# Altium PCB PCB2.PcbDoc
Units mm, origin at the board's own origin, x right, y up, seen from the top; angles counter-clockwise.
Board outline 74.93 x 58.67 mm, 2 copper layers (Top Layer, Bottom Layer); 44 components, 35 nets, 133 pads, 0 vias.
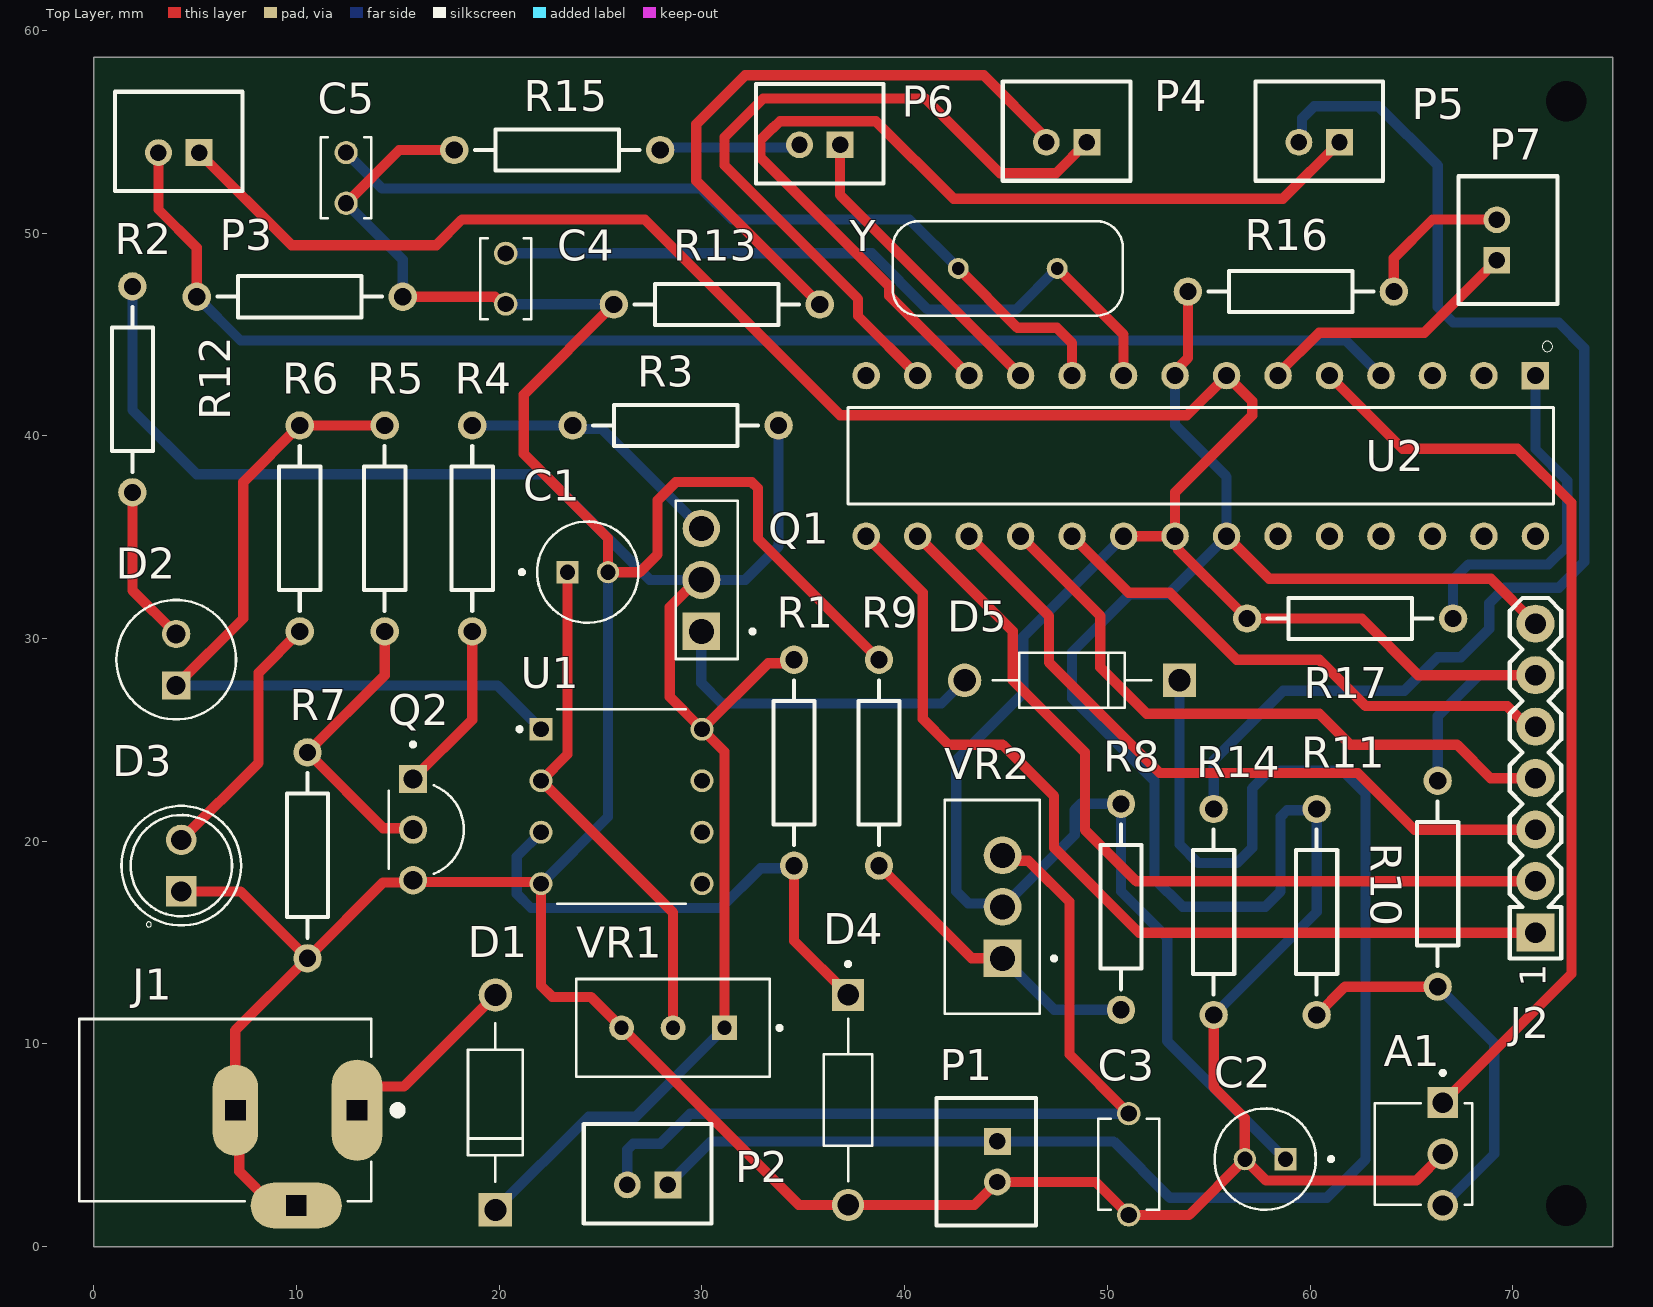
[diagram p0: Top Layer view]
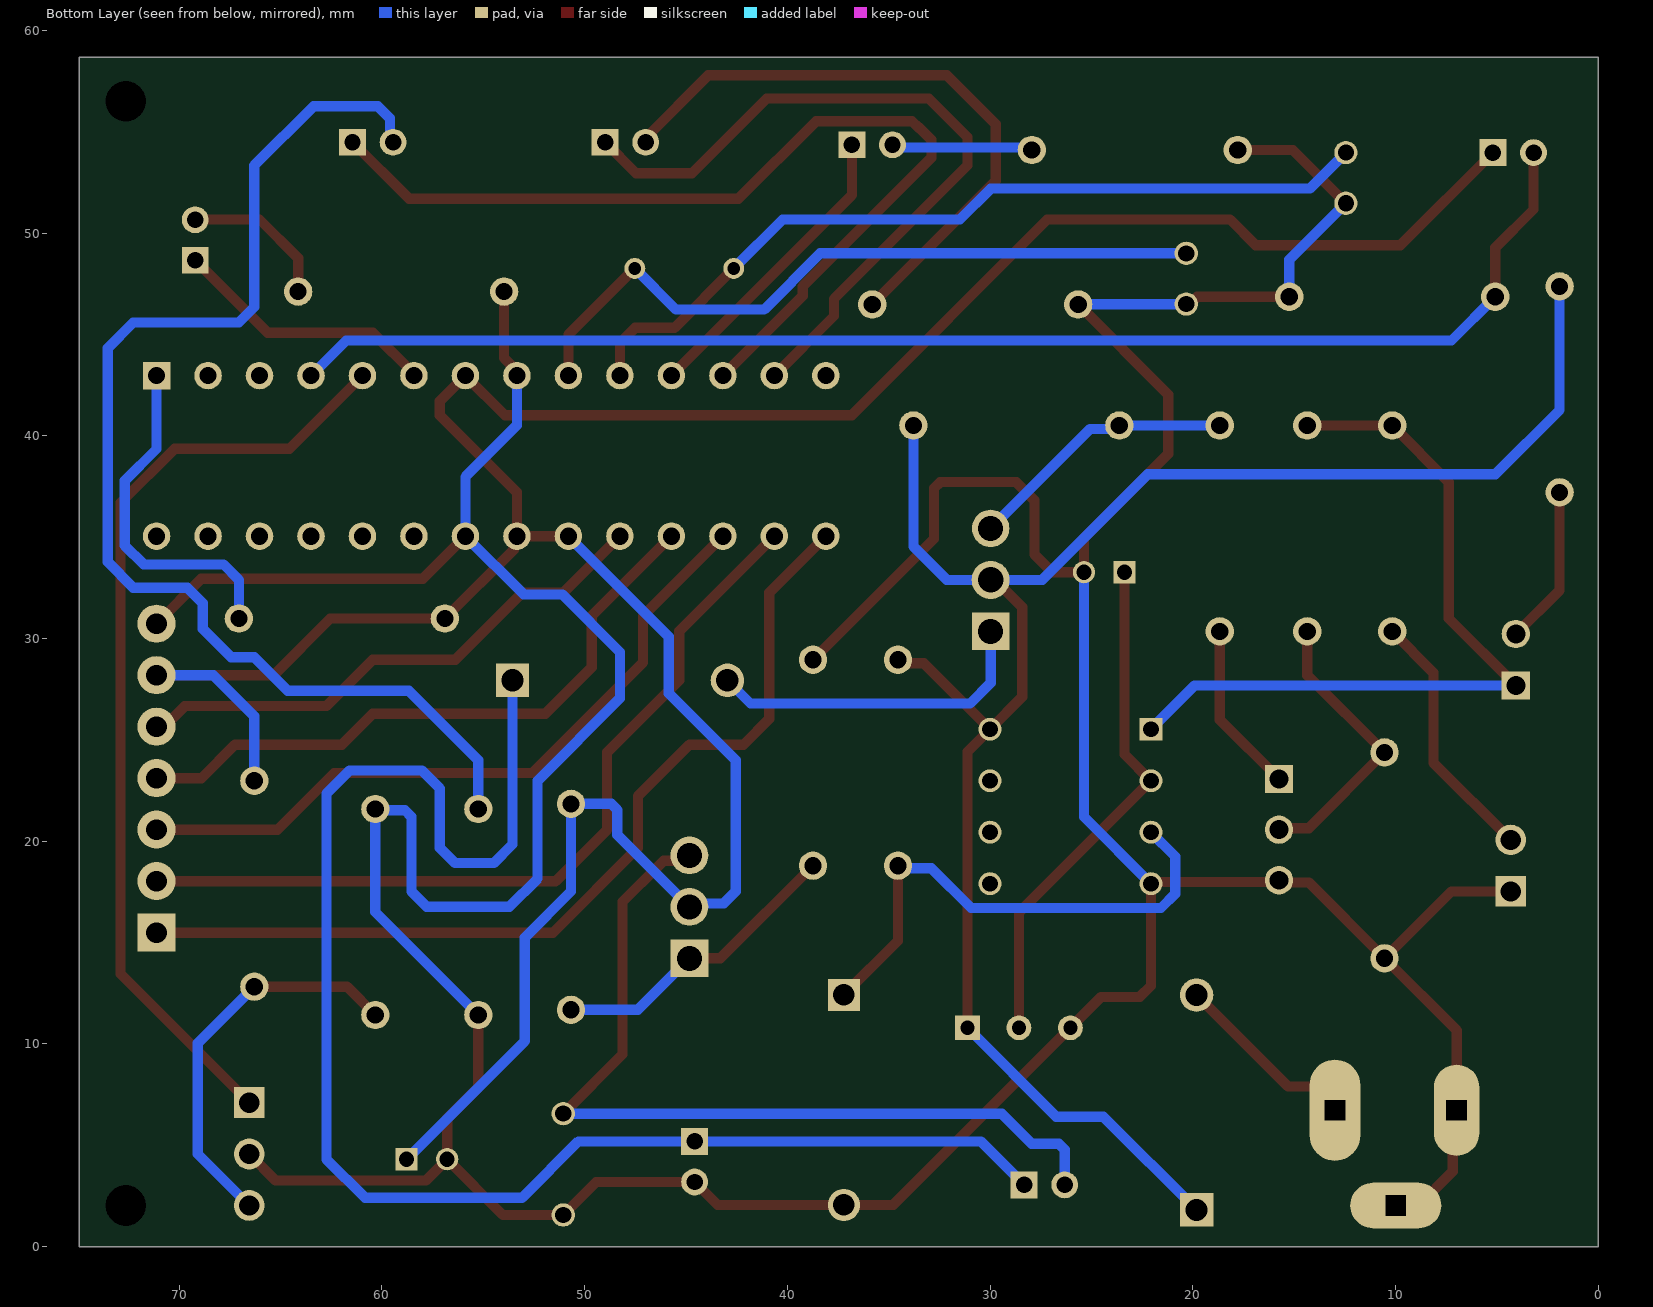
[diagram p1: Bottom Layer view, seen from below]

## Layer stack, top to bottom
Top Solder: solder mask 0.0102, Solder Resist, Dk 3.5
Top Layer: signal copper 0.0356
Dielectric 1: dielectric 0.32, FR-4, Dk 4.8
Bottom Layer: signal copper 0.0356
Bottom Solder: solder mask 0.0102, Solder Resist, Dk 3.5

## Board outline
0,0 74.93,0 74.93,58.674 0,58.674

## Design rules (kind name [scope] priority, off if disabled: settings)
Clearance Clearance_1 [All] p1: gap=0.254 ignorepadtopadclearanceinfootprint=FALSE except(0: Arc-Hole Track-Hole SMDPad-Hole THPad-Hole Via-Hole Fill-Hole Poly-Hole Region-Hole Text-Hole)
Clearance [All] p2: gap=0.381 ignorepadtopadclearanceinfootprint=FALSE except(0.508: Arc-Hole Track-Hole SMDPad-Hole THPad-Hole Via-Hole Fill-Hole Poly-Hole Region-Hole Text-Hole)
PolygonConnect [All] p1: connectstyle=Relief reliefconductorwidth=0.254 reliefentries=4 polygonreliefangle="90 Angle" airgapwidth=0.254
RoutingVias [All] p1: holewidth=0.711 width=1.27 viastyle="Through Hole" minholewidth=0.711 minwidth=1.27 maxholewidth=0.711 maxwidth=1.27
SolderMaskExpansion [All] p1: expansion=0.102 istentingtop=FALSE
Width [All] p1: maxlimit=0.635 minlimit=0.381 preferedwidth=0.508
30 further rules are at their usual default settings.

## Components (designator, comment, footprint, x,y, rotation, side; value= is the part's Value field where it differs from the comment)
A1 "TSOP38238" XDCR_TSOP38238 66.548,4.572 r270 top
C1 "EEUEB1H1R0S" CAPPRD200W50D500H1100 24.368,33.274 r0 top value=1uF
C2 "EEUEB1H1R0S" CAPPRD200W50D500H1100 57.785,4.318 r180 top
C3 "FA24X7R2A104KNU00" CAPRB500W50L450T300H550 51.054,4.064 r90 top value=0.1uF
C4 "FG18C0G2A220JNT06" CAPRB250W50L400T250H550 20.32,47.752 r90 top value=22pF
C5 "FG18C0G2A220JNT06" CAPRB250W50L400T250H550 12.446,52.725 r90 top value=22pF
D1 "1N4007" DIOAD1060W80L520D270 19.812,7.112 r90 top
D2 "L-53GD" LEDRD254W50D500H1060 4.064,28.956 r90 top
D3 "WP7113ID" LED_WP7113ID 4.318,18.796 r90 top
D4 "BZX85C3V3" DIOAD1036W73L450D282 37.211,7.239 r270 top
D5 "1N4007" DIOAD1060W80L520D270 48.26,27.94 r180 top
J1 "PJ-002B" CUI_PJ-002B 12.985,6.731 r180 top
J2 "61300711121" 1X07-PIN 71.12,15.494 r90 top
P1 "B2B-PH-K" B2B-PH-K 44.577,4.191 r270 top
P2 "B2B-PH-K" B2B-PH-K 27.321,3.048 r180 top
P3 "B2B-PH-K" B2B-PH-K 4.191,53.975 r180 top
P4 "B2B-PH-K" B2B-PH-K 47.99,54.483 r180 top
P5 "B2B-PH-K" B2B-PH-K 60.452,54.483 r180 top
P6 "B2B-PH-K" B2B-PH-K 35.814,54.356 r180 top
P7 "B2B-PH-K" B2B-PH-K 69.215,49.657 r90 top
Q1 "BD140G" TO245P780X300X1364-3 30.277,32.893 r90 top
Q2 "BC547B" TO92250P510H770-3 16.403,20.574 r270 top
R1 "Res2" AXIAL-0.4 34.544,23.876 r90 top value=1K
R2 "Res2" AXIAL-0.4 1.905,42.291 r90 top value=1K
R3 "Res2" AXIAL-0.4 28.702,40.513 r0 top value=1K
R4 "Res2" AXIAL-0.4 18.669,35.433 r90 top value=220
R5 "Res2" AXIAL-0.4 14.351,35.433 r270 top value=1K
R6 "Res2" AXIAL-0.4 10.16,35.433 r90 top value=1K
R7 "Res2" AXIAL-0.4 10.541,19.304 r90 top value=1K
R8 "Res2" AXIAL-0.4 50.673,16.764 r90 top value=270
R9 "Res2" AXIAL-0.4 38.735,23.876 r270 top value=820
R10 "Res2" AXIAL-0.4 66.294,17.907 r90 top value=270
R11 "Res2" AXIAL-0.4 60.325,16.51 r270 top value=560
R12 "Res2" AXIAL-0.4 10.16,46.863 r0 top value=10K
R13 "Res2" AXIAL-0.4 30.734,46.482 r0 top value=330
R14 "Res2" AXIAL-0.4 55.245,16.51 r90 top value=330
R15 "Res2" AXIAL-0.4 22.86,54.102 r0 top value=330
R16 "Res2" AXIAL-0.4 59.055,47.117 r0 top value=330
R17 "Res2" AXIAL-0.4 61.976,30.988 r0 top value=10K
U1 "LM358PE3" DIP794W45P254L959H508Q8 26.035,21.717 r0 top
U2 "ATMEGA328P-PU" DIP794W46P254L2967H457Q28B 54.61,39.012 r270 top
VR1 "3296W-1-103LF" TRIM_3296W-1-103LF 28.575,10.795 r180 top value=10K
VR2 "LM317T" TO254P1054X470X1955-3 44.831,16.764 r90 top
Y "ECS-160-S-4" XTAL_ECS-160-20-4X 45.085,48.26 r0 top

## Footprints (in the part's own frame and the unit in brackets; to place one, negate y for a bottom-side part, rotate by r counter-clockwise, add the part's x,y. Pads: shape width x height; smd on the part's side, far side on the other; paste and mask are expansions set on the pad)
1X07-PIN [mil]
  rect 74x74 / inner round 74 / far side rect 74x74 hole 40: 1(0,0)
  round 74 hole 40: 2(100,0) 3(200,0) 4(300,0) 5(400,0) 6(500,0) 7(600,0)
  silkscreen extent -50,-50 650,50
AXIAL-0.4 [mm] "Axial Device, Thru-Hole; 2 Leads; 0.4 in Pin Spacing"
  round 1.4 hole 0.85: 1(-5.08,0) 2(5.08,0)
  silkscreen extent -4.06,-1.02 4.06,1.02
B2B-PH-K [mil]
  rect 52x52 / inner round 52 / far side rect 52x52 hole 32: 1(-39.37,0)
  round 52 hole 32: 2(39.37,0)
  silkscreen extent -124,-118 124,75, body extent -116,-110 116,67, height 236
CAPPRD200W50D500H1100 [mm]
  round 1.1 hole 0.75: N(1,0)
  rect 1.1x1.1 hole 0.75: P(-1,0)
  silkscreen extent -3.35,-2.5 2.5,2.5, body extent -2.5,-2.5 2.5,2.5, height 11
CAPRB250W50L400T250H550 [mm]
  round 1.15 hole 0.8: 1(-1.25,0) 2(1.25,0)
  silkscreen extent -2,-1.25 2,1.25
CAPRB500W50L450T300H550 [mm]
  round 1.15 hole 0.8: 1(-2.5,0) 2(2.5,0)
  silkscreen extent -2.25,-1.5 2.25,1.5, body extent -2.24,-1.5 2.24,1.5, height 2.75
CUI_PJ-002B [mm]
  oval 2.5x5 hole 1 square: 1(0,0)
  oval 2.25x4.5 hole 1 square: 2(6,0)
  oval 4.5x2.25 hole 1 square: 3(3,4.7)
  silkscreen extent -2.2,-4.5 13.7,4.5, body extent -0.7,-4.5 13.7,4.9, height 11
DIOAD1036W73L450D282 [mm]
  round 1.59 hole 1.06: A(5.18,0)
  rect 1.59x1.59 / inner round 1.59 / far side rect 1.59x1.59 hole 1.06: C(-5.18,0)
  silkscreen extent -6.8,-1.2 4,1.2, body extent -5.55,-1.4 5.55,1.4, height 2.8
DIOAD1060W80L520D270 [mm]
  round 1.65 hole 1.1: A(5.3,0)
  rect 1.65x1.65 / inner round 1.65 / far side rect 1.65x1.65 hole 1.1: C(-5.3,0)
  silkscreen extent -3.9,-1.35 3.9,1.35, body extent -4.24,-1 4.24,1, height 2
DIP794W45P254L959H508Q8 [mm]
  rect 1.13x1.13 hole 0.78: 1(-3.97,3.81)
  round 1.13 hole 0.78: 2(-3.97,1.27) 3(-3.97,-1.27) 4(-3.97,-3.81) 5(3.97,-3.81) 6(3.97,-1.27) 7(3.97,1.27) 8(3.97,3.81)
  silkscreen extent -5.13,-4.79 3.17,4.79
DIP794W46P254L2967H457Q28B [mm]
  rect 1.358x1.358 hole 0.85: 1(-3.96,16.51)
  round 1.358 hole 0.85: 2(-3.96,13.97) 3(-3.96,11.43) 4(-3.96,8.89) 5(-3.96,6.35) 6(-3.96,3.81) 7(-3.96,1.27) 8(-3.96,-1.27) 9(-3.96,-3.81) 10(-3.96,-6.35) 11(-3.96,-8.89) 12(-3.96,-11.43) 13(-3.96,-13.97) 14(-3.96,-16.51) 15(3.96,-16.51) 16(3.96,-13.97) 17(3.96,-11.43) 18(3.96,-8.89) 19(3.96,-6.35) 20(3.96,-3.81) 21(3.96,-1.27) 22(3.96,1.27) 23(3.96,3.81) 24(3.96,6.35) 25(3.96,8.89) 26(3.96,11.43) 27(3.96,13.97) 28(3.96,16.51)
  silkscreen extent -5.65,-17.4 2.38,17.4
LED_WP7113ID [mm]
  round 1.508 hole 1: A(1.27,0)
  rect 1.508x1.508 / inner round 1.508 / far side rect 1.508x1.508 hole 1: C(-1.27,0)
  silkscreen extent -3.03,-2.95 2.95,2.95, body extent -2.5,-2.95 2.95,2.95, height 9.6
LEDRD254W50D500H1060 [mm]
  round 1.4 hole 0.93: A(1.27,0)
  rect 1.4x1.4 / inner round 1.4 / far side rect 1.4x1.4 hole 0.93: C(-1.27,0)
  silkscreen extent -2.95,-2.95 2.95,2.95, body extent -2.5,-2.95 2.95,2.95, height 9.6
TO245P780X300X1364-3 [mm]
  rect 1.85x1.85 hole 1.23: 1(-2.54,0.305)
  round 1.88 hole 1.25: 2(0,0.305)
  round 1.85 hole 1.23: 3(2.54,0.305)
  silkscreen extent -3.9,-2.32 3.9,1.56, body extent -3.8,-1.52 3.8,1.14, height 13.2
TO254P1054X470X1955-3 [mm]
  rect 1.86x1.86 / inner round 1.86 / far side rect 1.86x1.86 hole 1.24: 1(-2.54,0)
  round 1.86 hole 1.24: 2(0,0) 3(2.54,0)
  silkscreen extent -5.27,-2.64 5.27,2.86, body extent -5.08,-1.49 5.08,2.71, height 22.86
TO92250P510H770-3 [mm]
  rect 1.4x1.4 / inner round 1.4 / far side rect 1.4x1.4 hole 0.93: 1(-2.5,-0.655)
  round 1.4 hole 0.93: 2(0,-0.655) 3(2.5,-0.655)
  silkscreen extent -4.3,-1.85 2.18,1.85, body extent -2.38,-1.43 2.38,2.19, height 5.33
TRIM_3296W-1-103LF [mm]
  rect 1.218x1.218 hole 0.71: 1(-2.54,0)
  round 1.218 hole 0.71: 2(0,0) 3(2.54,0)
  silkscreen extent -5.35,-2.41 4.76,2.42, body extent -4.76,-2.41 4.76,2.42, height 11.55
XDCR_TSOP38238 [mm]
  rect 1.518x1.518 hole 1.01: 1(-2.54,0)
  round 1.518 hole 1.01: 2(0,0) 3(2.54,0)
  silkscreen extent -4.1,-3.35 2.5,1.45
XTAL_ECS-160-20-4X [mm]
  round 1.03 hole 0.63: 1(-2.44,0) 2(2.44,0)
  silkscreen extent -5.68,-2.33 5.68,2.33

## Part data
A1: "Remote Receiver Sensor, 38.0kHz 45m", Package=None, Availability=Good, DigiKey-Purchase-URL=https://snapeda.com/shop?store=DigiKey&id=45262, MF=Vishay, Mouser-Purchase-URL=https://snapeda.com/shop?store=Mouser&id=45262, MP=TSOP38238, Price=None, SnapEDA_Link=https://www.snapeda.com/parts/TSOP38238/Vishay%20Semiconductor%20Opto%20Division/view-part/45262/?ref=snap
C1 C2: "CAP ALUM 1UF 20% 50V RADIAL", Package="RADIAL-2 Panasonic", Availability="Not in stock", Check_prices=https://www.snapeda.com/parts/EEUEB1H1R0S/Panasonic/view-part/5782839/?ref=eda, MF=Panasonic, MP=EEUEB1H1R0S, Price=None, SnapEDA_Link=https://www.snapeda.com/parts/EEUEB1H1R0S/Panasonic/view-part/5782839/?ref=snap
C3: "0.1 µF ±10% 100V Ceramic Capacitor X7R Radial", Package="Radial TDK", Availability="In Stock", Check_prices=https://www.snapeda.com/parts/FA24X7R2A104KNU00/TDK/view-part/?ref=eda, MF=TDK, MP=FA24X7R2A104KNU00, Price=None, Purchase-URL=https://pricing.snapeda.com/search/part/FA24X7R2A104KNU00/?ref=eda, SnapEDA_Link=https://www.snapeda.com/parts/FA24X7R2A104KNU00/TDK/view-part/?ref=snap
C4 C5: "Cap Ceramic 22pF 100V C0G 5% Radial 2.5mm 125Â°C Ammo", Package="Radial TDK Corporation", Check_prices=https://www.snapeda.com/parts/FG18C0G2A220JNT06/TDK/view-part/?ref=eda, Digi-Key_Part_Number=445-173230-1-ND, MF=TDK, MP=FG18C0G2A220JNT06, Purchase-URL=https://pricing.snapeda.com/search/part/FG18C0G2A220JNT06/?ref=eda, SnapEDA_Link=https://www.snapeda.com/parts/FG18C0G2A220JNT06/TDK/view-part/?ref=snap
D1 D5: "Diode Standard 1000 V 1A Through Hole DO-41", Package="DO-41 NTE Electronics", Availability="In Stock", Check_prices=https://www.snapeda.com/parts/1N4007/NTE+Electronics/view-part/?ref=eda, MF="NTE Electronics, Inc.", MP=1N4007, Price=None, Purchase-URL=https://pricing.snapeda.com/search/part/1N4007/?ref=eda, SnapEDA_Link=https://www.snapeda.com/parts/1N4007/NTE+Electronics/view-part/?ref=snap
D2: "LED 5mm Green 568nm 20mcd/10mA 60Â°", Package=CDIP-28, Availability=Unavailable, Check_prices=https://www.snapeda.com/parts/L-53GD/Kingbright/view-part/?ref=eda, MF=Kingbright, MP=L-53GD, Price=None, SnapEDA_Link=https://www.snapeda.com/parts/L-53GD/Kingbright/view-part/?ref=snap
D3: "Red 617nm LED Indication - Discrete 2V Radial", Package="Radial Kingbright", Availability="In Stock", Check_prices=https://www.snapeda.com/parts/WP7113ID/Kingbright/view-part/?ref=eda, MF=Kingbright, MP=WP7113ID, Price=None, Purchase-URL=https://pricing.snapeda.com/search/part/WP7113ID/?ref=eda, SnapEDA_Link=https://www.snapeda.com/parts/WP7113ID/Kingbright/view-part/?ref=snap
D4 U1: Package=None, Availability=Unavailable, Price=None
  D4: MP=BZX85C3V3
  U1: MP=LM358PE3
J1: "2.5 x 6.5 mm, 2.5 A, Horizontal, Through Hole, Dc Power Jack Connector", Package=None, Availability="In Stock", Check_prices=https://www.snapeda.com/parts/PJ-002B/CUI+Devices/view-part/?ref=eda, CUI_purchase_URL=https://www.cuidevices.com/product/interconnect/connectors/dc-power-connectors/jacks/pj-002b?utm_source=snapeda.com&utm_medium=referral&utm_campaign=snapedaBOM, MF="CUI Devices", MP=PJ-002B, Price=None, Purchase-URL=https://pricing.snapeda.com/search/part/PJ-002B/?ref=eda, SnapEDA_Link=https://www.snapeda.com/parts/PJ-002B/CUI+Devices/view-part/?ref=snap
J2: "Connector Header Through Hole 7 position 0.100 (2.54mm)", Package=None, Availability="In Stock", Check_prices=https://www.snapeda.com/parts/61300711121/Wurth+Elektronik/view-part/?ref=eda, MF="Wurth Elektronik", MP=61300711121, Price=None, SnapEDA_Link=https://www.snapeda.com/parts/61300711121/Wurth+Elektronik/view-part/?ref=snap
P1 P2 P3 P4 P5 P6 P7: "Conn Shrouded Header HDR 2 POS 2mm Solder ST Thru-Hole Box", Package=None, Availability="In Stock", Check_prices=https://www.snapeda.com/parts/B2B-PH-K/JST/view-part/?ref=eda, MF="JST Corporation", MP=B2B-PH-K, Price=None, Purchase-URL=https://pricing.snapeda.com/search/part/B2B-PH-K/?ref=eda, SnapEDA_Link=https://www.snapeda.com/parts/B2B-PH-K/JST/view-part/?ref=snap
Q1: "Bipolar (BJT) Transistor PNP 80 V 1.5 A - 1.25 W Through Hole TO-126", Package="TO-225-3 ON Semiconductor", Availability="In Stock", Check_prices=https://www.snapeda.com/parts/BD140G/Onsemi/view-part/?ref=eda, MF="ON Semiconductor", MP=BD140G, Price=None, Purchase-URL=https://pricing.snapeda.com/search/part/BD140G/?ref=eda, SnapEDA_Link=https://www.snapeda.com/parts/BD140G/Onsemi/view-part/?ref=snap
Q2: "Bipolar (BJT) TransistÃ¶r NPN 45 V 100 mA 300MHz 625 mW Delikten TO-92 (TO-226)", Package="TO-92-3 ON Semiconductor", Availability="In Stock", Check_prices=https://www.snapeda.com/parts/BC547B/Onsemi/view-part/?ref=eda, MF="ON Semiconductor", MP=BC547B, Price=None, Purchase-URL=https://pricing.snapeda.com/search/part/BC547B/?ref=eda, SnapEDA_Link=https://www.snapeda.com/parts/BC547B/Onsemi/view-part/?ref=snap
R1 R2 R3 R4 R5 R6 R7 R8 R9 R10 R11 R12 R13 R14 R15 R16 R17: "Resistor", LatestRevisionDate=17-Jul-2002, LatestRevisionNote="Re-released for DXP Platform.", PackageDescription="Axial Device, Thru-Hole; 2 Leads; 0.4 in Pin Spacing", PackageReference=AXIAL-0.4, Published=8-Jun-2000, Publisher="Altium Limited"
U2: "ATmega Series 20 MHz 32 KB Flash 2 KB SRAM 8-Bit Microcontroller - DIP-28", Package=None, Availability=Unavailable, MP=ATMEGA328P-PU, Price=None
VR1: "10 kOhms 0.5W, 1/2W PC Pins Through Hole Trimmer Potentiometer Cermet 25.0 Turn Top Adjustment", Package="SOT-23-5 Bourns", Availability="In Stock", Check_prices=https://www.snapeda.com/parts/3296W-1-103LF/Bourns/view-part/?ref=eda, MF=Bourns, MP=3296W-1-103LF, Price=None, Purchase-URL=https://pricing.snapeda.com/search/part/3296W-1-103LF/?ref=eda, SnapEDA_Link=https://www.snapeda.com/parts/3296W-1-103LF/Bourns/view-part/?ref=snap
VR2: "1.5-A, 40-V, adjustable linear voltage regulator 3-TO-220", Package="TO-220-3 Texas Instruments", Availability="In Stock", Check_prices=https://www.snapeda.com/parts/LM317T/Texas+Instruments/view-part/?ref=eda, MF="Texas Instruments", MP=LM317T, Price=None, Purchase-URL=https://pricing.snapeda.com/search/part/LM317T/?ref=eda, SnapEDA_Link=https://www.snapeda.com/parts/LM317T/Texas+Instruments/view-part/?ref=snap
Y: "16MHz Â±30ppm Crystal Series 40 Ohms HC-49/US", Package="HC49/US ECS International", Availability=Unavailable, MF="ECS Inc.", MP=ECS-160-S-4, Price=None, SnapEDA_Link=https://www.snapeda.com/parts/ECS-160-S-4/ECS%20Inc./view-part/3657575/?ref=snap

## Free pads (board coordinates)
  round 0 hole 2 unplated: 5(72.644,56.515) 6(72.644,2.032)

## Nets (pads, with @x,y where several pads share a name; then routed paths per layer and width w, separated by ;. In a path a pad name is that pad's centre, name@x,y a point inside that pad or via, vN(x,y) a via of type N, cw(c..) or ccw(c..) an arc to the next point about the centre after c; other vN are vias at no path point)
GND: A1.2 C1.N C2.N C3.1 C4.1 C5.1 D3.C D4.A J1.2 J1.3 J2.7 P1.2 Q2.3 R7.1 R9.1 R11.1 R12.2 R13.1 R14.1 R15.1 R16.1 U1.4 U2.8 U2.22 VR1.3 | length 258
  Top Layer w0.508: D3.C 7.239,17.526 R7.1 ; J1.3 8.86,2.031 7.172,3.719 7.172,6.544 J1.2 6.985,10.668 R7.1 ; C5.1 15.073,54.102 R15.1 ; R12.2 19.785,46.863 20.146,46.502 C4.1 ; R13.1 21.209,42.037 21.209,39.116 25.368,34.957 C1.N 26.924,33.274 27.813,34.163 27.813,36.83 28.702,37.719 32.468,37.719 32.766,37.421 32.766,34.925 R9.1 ; U2.8 53.34,43.202 53.975,43.837 R16.1 ; R14.1 55.245,7.874 56.785,6.334 C2.N ; U2.22 57.989,32.943 68.911,32.943 J2.7 ; A1.2 65.236,3.26 57.843,3.26 C2.N ; R7.1 14.286,17.969 15.643,17.969 Q2.3 15.831,17.99 21.982,17.99 U1.4 22.065,12.86 22.606,12.319 24.511,12.319 VR1.3 34.771,2.059 D4.A 43.445,2.059 P1.2 49.427,3.191 C3.1 54.031,1.564 C2.N
  Bottom Layer w0.508: C5.1 15.24,48.681 R12.2 ; C4.1 20.33,46.492 25.644,46.492 R13.1 ; U1.4 25.368,21.21 C1.N ; D4.A D4.A@37.406,1.864 ; U2.8 53.34,40.513 55.88,37.973 U2.22 53.005,32.177 51.1,32.177 48.26,29.337 48.26,27.051 52.324,22.987 52.324,18.161 53.721,16.764 57.785,16.764 58.547,17.526 58.547,21.209 58.863,21.525 60.26,21.525 R11.1 60.325,16.51 R14.1
NetA1_1: A1.1 U2.5 | length 46.8
  Top Layer w0.508: U2.5 64.562,39.37 70.231,39.37 72.898,36.703 72.898,13.462 A1.1
NetA1_3: A1.3 R10.1 R11.2 | length 19.6
  Top Layer w0.508: R11.2 61.722,12.827 R10.1
  Bottom Layer w0.508: R10.1 69.088,10.033 69.088,4.572 A1.3
NetC1_P: C1.P U1.2 VR1.2 | length 25.7
  Top Layer w0.508: C1.P 23.368,24.29 U1.2 28.575,16.477 VR1.2
NetC3_2: C3.2 P2.2 VR2.3 | length 43.1
  Top Layer w0.508: VR2.3 45.09,19.045 46.106,19.045 46.354,18.797 48.133,17.018 48.133,9.485 C3.2
  Bottom Layer w0.508: P2.2 26.321,4.782 26.619,5.08 27.94,5.08 29.424,6.564 C3.2
NetC4_2: C4.2 U2.9 Y.2 | length 35.8
  Top Layer w0.508: Y.2 50.8,44.985 U2.9
  Bottom Layer w0.508: C4.2 38.374,49.002 41.148,46.228 45.493,46.228 Y.2
NetC5_2: C5.2 U2.10 Y.1 | length 41.3
  Top Layer w0.508: Y.1 45.566,45.339 47.498,45.339 48.26,44.577 U2.10
  Bottom Layer w0.508: C5.2 14.224,52.197 29.972,52.197 31.496,50.673 40.232,50.673 Y.1
NetD1_A: D1.A J1.1 | length 9.3
  Top Layer w0.508: J1.1 12.985,6.986 13.905,7.906 15.306,7.906 D1.A
NetD1_C: D1.C Q1.2 R1.2 R2.2 R3.2 U1.8 VR1.1 | length 93.4
  Top Layer w0.508: Q1.2@30.18,32.893 Q1.2 29.764,32.893 28.412,31.541 28.412,27.12 U1.8 ; VR1.1@31.205,10.885 VR1.1 31.115,24.417 U1.8 ; R1.2 34.373,28.785 33.263,28.785 U1.8
  Bottom Layer w0.508: R2.2 1.905,41.275 5.08,38.1 22.218,38.1 27.425,32.893 Q1.2 32.131,32.893 33.782,34.544 R3.2 ; D1.C 24.412,6.412 26.732,6.412 VR1.1
NetD2_A: D2.A R2.1 | length 7.9
  Top Layer w0.508: R2.1 1.905,32.385 D2.A
NetD2_C: D2.C R5.1 R6.2 U1.1 | length 38.4
  Top Layer w0.508: D2.C 7.366,30.988 7.366,37.719 R6.2 R5.1
  Bottom Layer w0.508: D2.C 19.906,27.686 U1.1
NetD3_A: D3.A R6.1 | length 12.7
  Top Layer w0.508: D3.A 8.128,23.876 8.128,28.321 R6.1
NetD4_C: D4.C R1.1 U1.3 | length 25.9
  Top Layer w0.508: R1.1 34.544,15.086 D4.C
  Bottom Layer w0.508: U1.3 20.865,19.247 20.865,17.41 21.568,16.707 30.931,16.707 32.893,18.669 34.417,18.669 R1.1
NetD5_A: D5.A Q1.1 | length 16.4
  Bottom Layer w0.508: Q1.1 29.972,27.813 30.988,26.797 41.817,26.797 D5.A
NetD5_C: D5.C P1.1 P2.1 | length 77
  Bottom Layer w0.508: P2.1 30.464,5.191 P1.1 50.308,5.191 53.086,2.413 60.833,2.413 62.738,4.318 62.738,22.352 61.595,23.495 58.039,23.495 57.15,22.606 57.15,19.685 56.388,18.923 54.483,18.923 53.56,19.846 D5.C
NetJ2_1: J2.1 U2.15 | length 46.3
  Top Layer w0.508: U2.15 40.894,32.258 40.894,26.035 42.164,24.765 44.831,24.765 47.371,22.225 47.371,19.685 51.562,15.494 J2.1
NetJ2_2: J2.2 U2.16 | length 41.2
  Top Layer w0.508: U2.16 45.339,30.353 45.339,27.94 48.895,24.384 48.895,20.574 51.435,18.034 J2.2
NetJ2_3: J2.3 U2.17 | length 35.3
  Top Layer w0.508: U2.17 47.117,31.115 47.117,28.829 52.578,23.368 62.357,23.368 65.151,20.574 J2.3
NetJ2_4: J2.4 U2.18 | length 31.8
  Top Layer w0.508: U2.18 49.657,31.115 49.657,28.575 51.943,26.289 60.452,26.289 61.976,24.765 67.251,24.765 68.902,23.114 J2.4
NetJ2_5: J2.5 U2.19 | length 26.8
  Top Layer w0.508: U2.19 51.054,32.258 53.086,32.258 56.388,28.956 60.452,28.956 62.738,26.67 69.733,26.67 70.749,25.654 J2.5
NetP3_2: P3.2 R12.1 U2.4 | length 67.9
  Top Layer w0.508: P3.2 3.191,51.165 5.08,49.276 R12.1
  Bottom Layer w0.508: R12.1 7.239,44.704 61.768,44.704 U2.4
NetP4_1: P4.1 U2.13 | length 36.5
  Top Layer w0.508: U2.13 37.701,45.911 37.701,46.754 31.115,53.34 31.115,54.737 33.02,56.642 41.021,56.642 44.704,52.959 47.466,52.959 P4.1
NetP4_2: P4.2 R13.2 | length 31.2
  Top Layer w0.508: R13.2 29.718,52.578 29.718,55.372 32.131,57.785 43.898,57.785 46.99,54.693 P4.2
NetP5_1: P5.1 U2.12 | length 47.6
  Top Layer w0.508: U2.12 39.243,46.909 39.243,47.371 32.893,53.721 32.893,54.61 33.484,55.201 33.528,55.201 33.851,55.524 38.583,55.524 42.418,51.689 58.658,51.689 P5.1
NetP5_2: P5.2 R14.2 | length 60.5
  Bottom Layer w0.508: R14.2 55.245,24.003 58.674,27.432 64.643,27.432 66.294,29.083 67.437,29.083 68.834,30.48 68.834,31.75 69.596,32.512 72.263,32.512 73.533,33.782 73.533,44.323 72.263,45.593 67.056,45.593 66.294,46.355 66.294,53.34 63.373,56.261 60.198,56.261 59.608,55.671 59.608,54.639 P5.2
NetP6_1: P6.1 U2.11 | length 15.1
  Top Layer w0.508: P6.1 36.814,51.878 U2.11
NetP6_2: P6.2 R15.2 | length 7
  Bottom Layer w0.508: R15.2 28.067,54.229 34.687,54.229 P6.2
NetP7_1: P7.1 U2.6 | length 13.2
  Top Layer w0.508: U2.6 58.42,43.053 60.452,45.085 65.643,45.085 P7.1
NetP7_2: P7.2 R16.2 | length 7.5
  Top Layer w0.508: R16.2 64.135,48.768 66.04,50.673 69.199,50.673 P7.2
NetQ1_3: Q1.3 R3.1 R4.2 | length 13.4
  Bottom Layer w0.508: R4.2 R3.1 23.793,40.342 25.063,40.342 Q1.3
NetQ2_1: Q2.1 R4.1 | length 8.5
  Top Layer w0.508: Q2.1 18.669,25.995 R4.1
NetQ2_2: Q2.2 R5.2 R7.2 | length 14.3
  Top Layer w0.508: R5.2 14.351,28.194 R7.2 14.286,20.639 15.683,20.639 Q2.2
NetR8_1: R8.1 R9.2 VR2.1 | length 14.9
  Top Layer w0.508: R9.2 43.307,14.224 VR2.1
  Bottom Layer w0.508: VR2.1 47.371,11.684 R8.1
NetR17_2: R17.2 U2.1 | length 17.3
  Bottom Layer w0.508: R17.2 67.056,32.893 67.818,33.655 71.755,33.655 72.688,34.588 72.688,37.783 71.12,39.351 U2.1
VCC: C2.P J2.6 P3.1 R8.2 R10.2 R17.1 U2.7 U2.20 U2.21 VR2.2 | length 153.3
  Top Layer w0.508: P3.1 9.763,49.403 16.891,49.403 18.161,50.673 27.178,50.673 36.83,41.021 53.929,41.021 U2.7 57.15,41.702 57.15,41.021 53.34,37.211 U2.21 ; U2.20 U2.21 ; J2.6 65.34,28.194 62.546,30.988 R17.1 53.503,34.381 53.503,34.889 U2.21
  Bottom Layer w0.508: U2.20 45.847,30.099 45.847,27.305 42.545,24.003 42.545,17.526 43.139,16.932 44.663,16.932 VR2.2 48.387,20.32 48.387,21.546 48.685,21.844 R8.2 50.673,17.526 52.959,15.24 52.959,10.144 C2.P ; R10.2 66.294,26.162 68.326,28.194 J2.6
pads on no net: U1.5 U1.6 U1.7 U2.2 U2.3 U2.14 U2.23 U2.24 U2.25 U2.26 U2.27 U2.28

## Silkscreen, mask and mechanical layers (free items; w line width, h text height)
Outline (Mech4):
  the board outline again, w0.254

## Text inside footprints (layer, text, board x,y; h text height)
J2: Top Overlay "1" at 71.628,12.827 h1.27 r90